# Altium PCB PCB1.PcbDoc
Units mm, origin at the board's own origin, x right, y up, seen from the top; angles counter-clockwise.
Board outline 50.04 x 50.04 mm, 2 copper layers (Top Layer, Bottom Layer); 10 components, 5 nets, 34 pads, 207 vias.
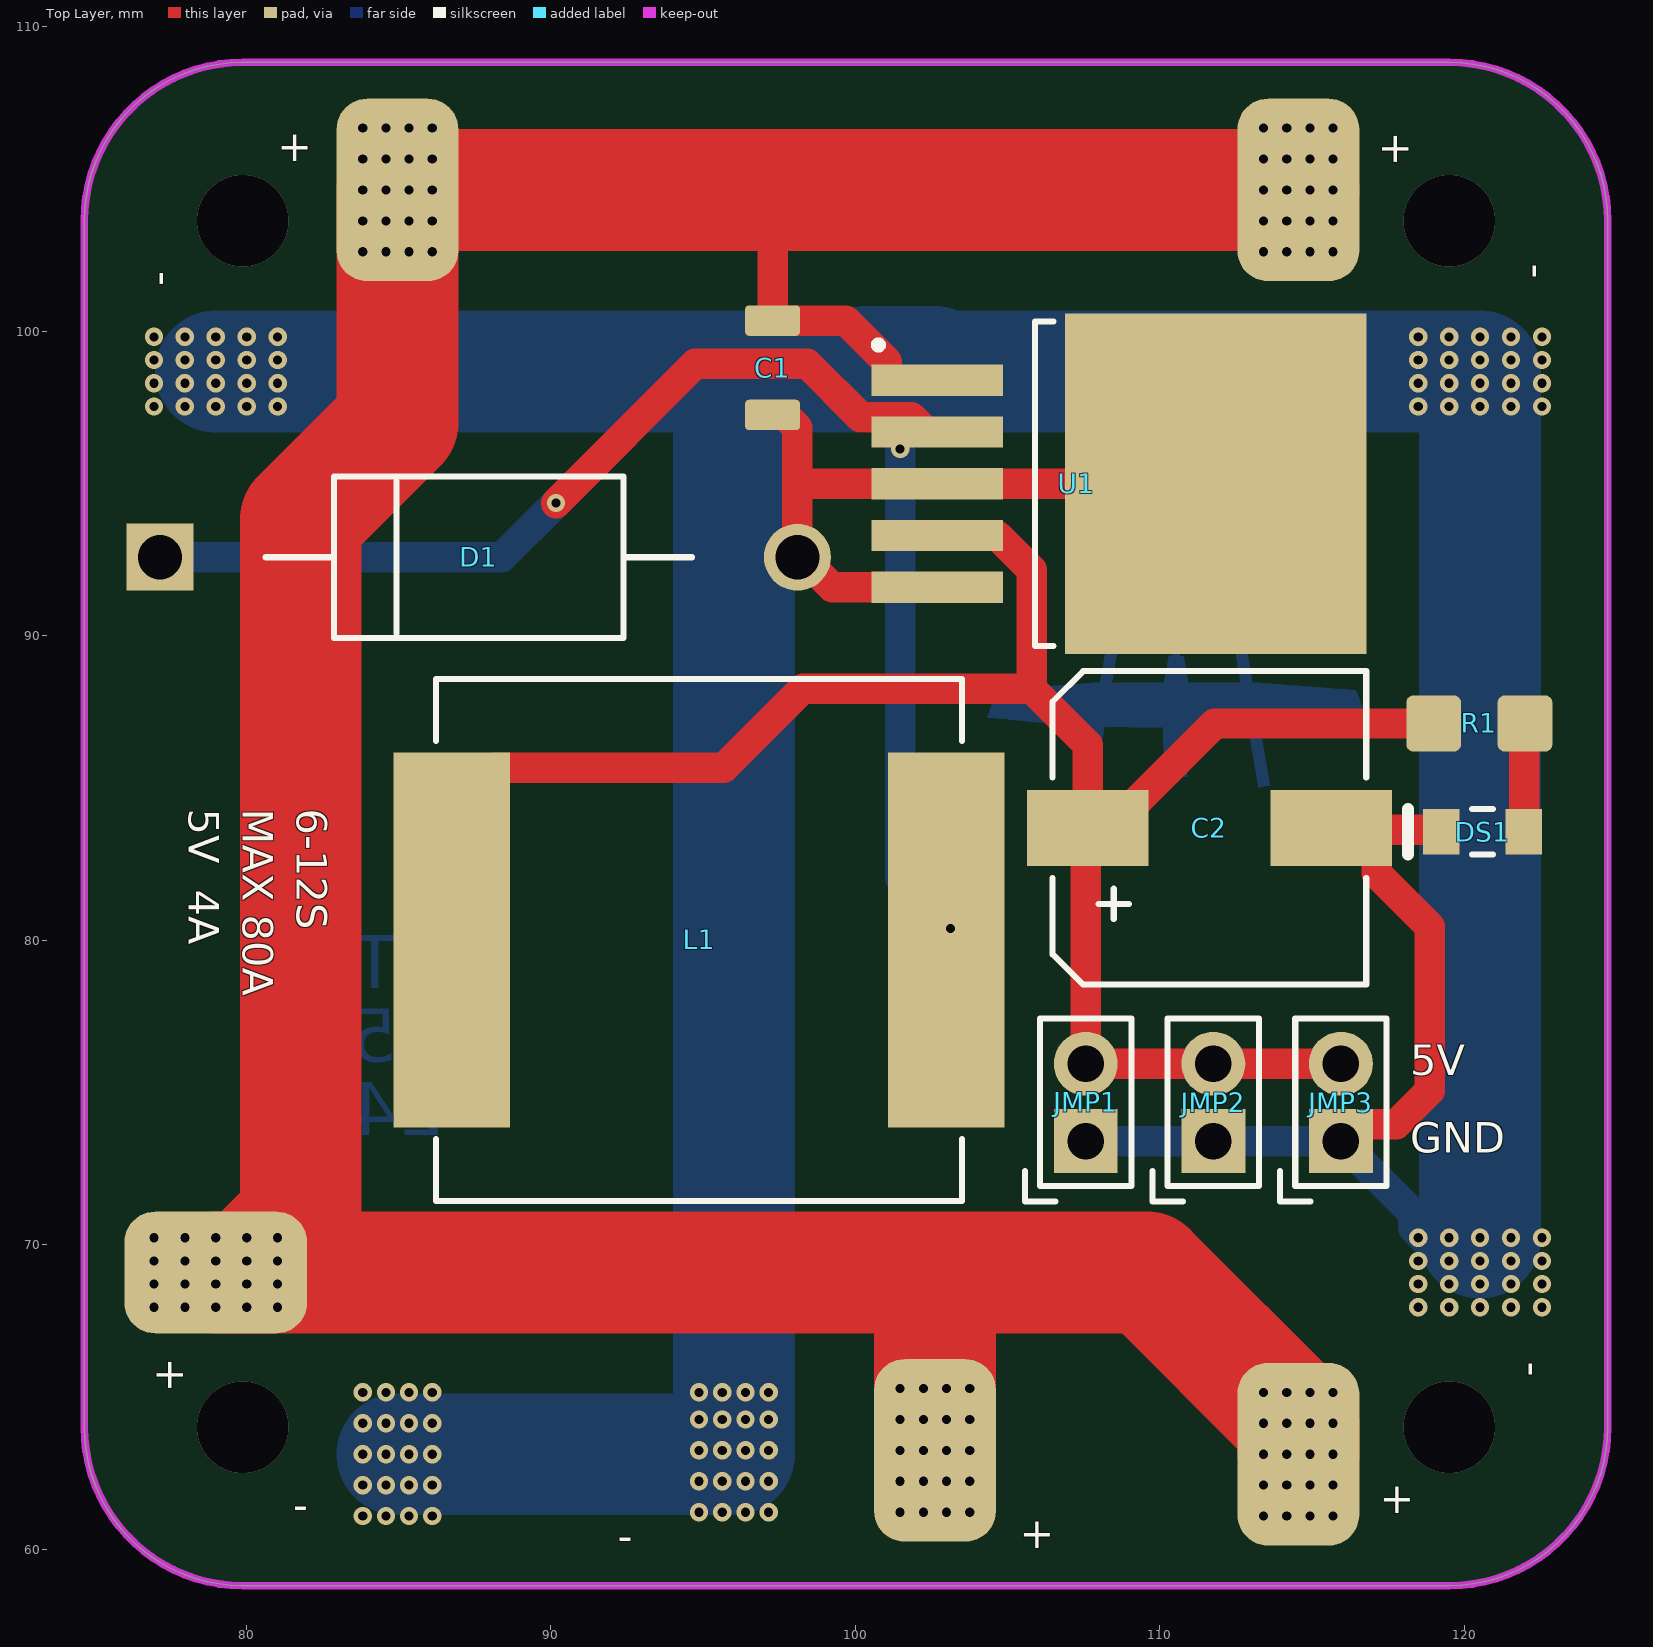
[diagram p0: Top Layer view]
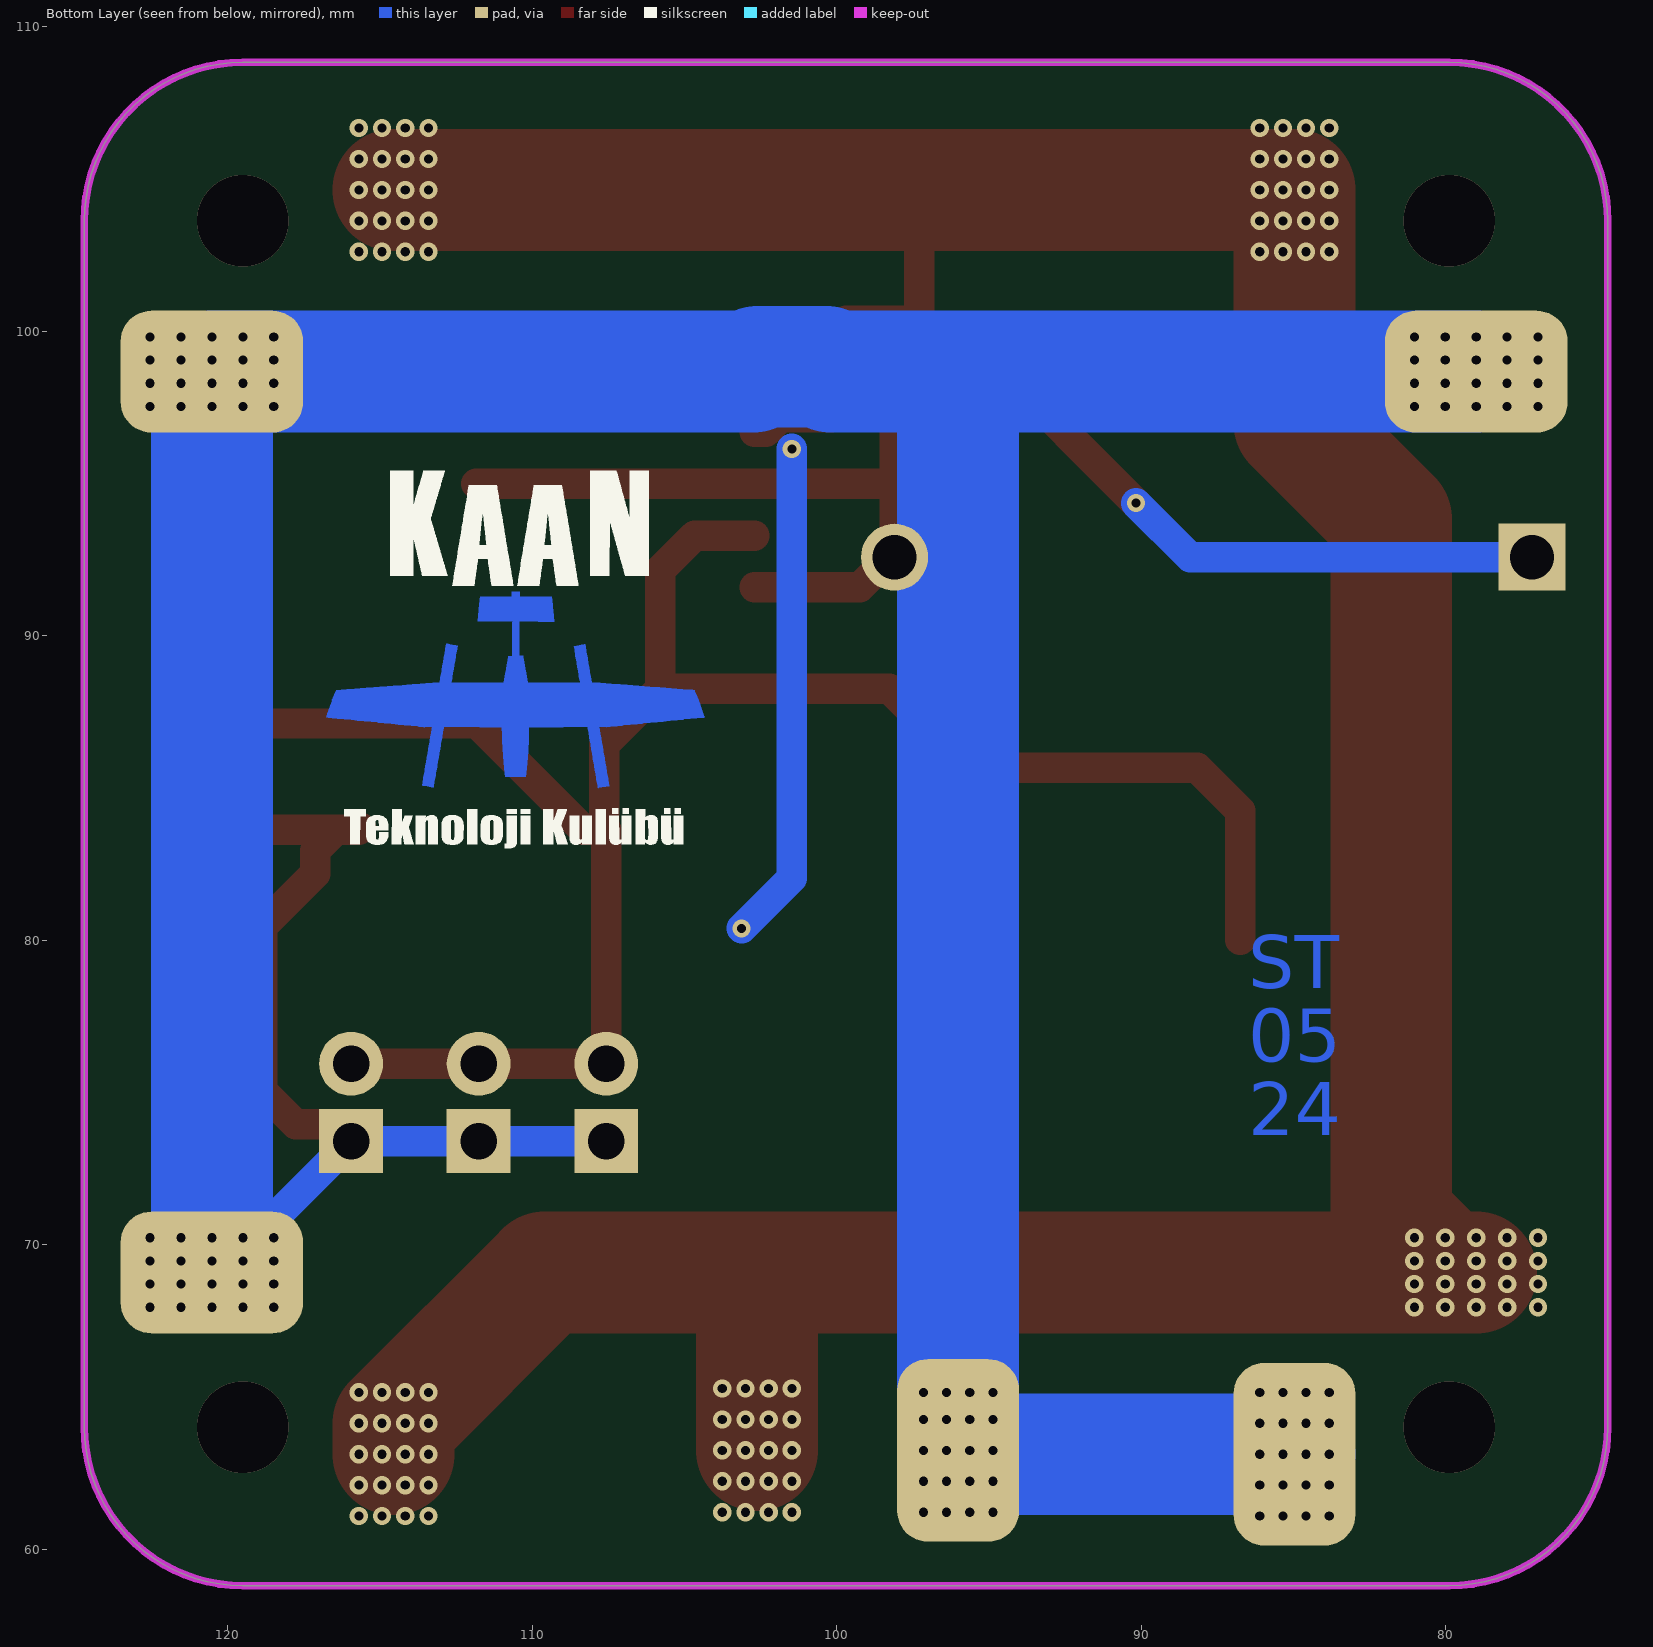
[diagram p1: Bottom Layer view, seen from below]
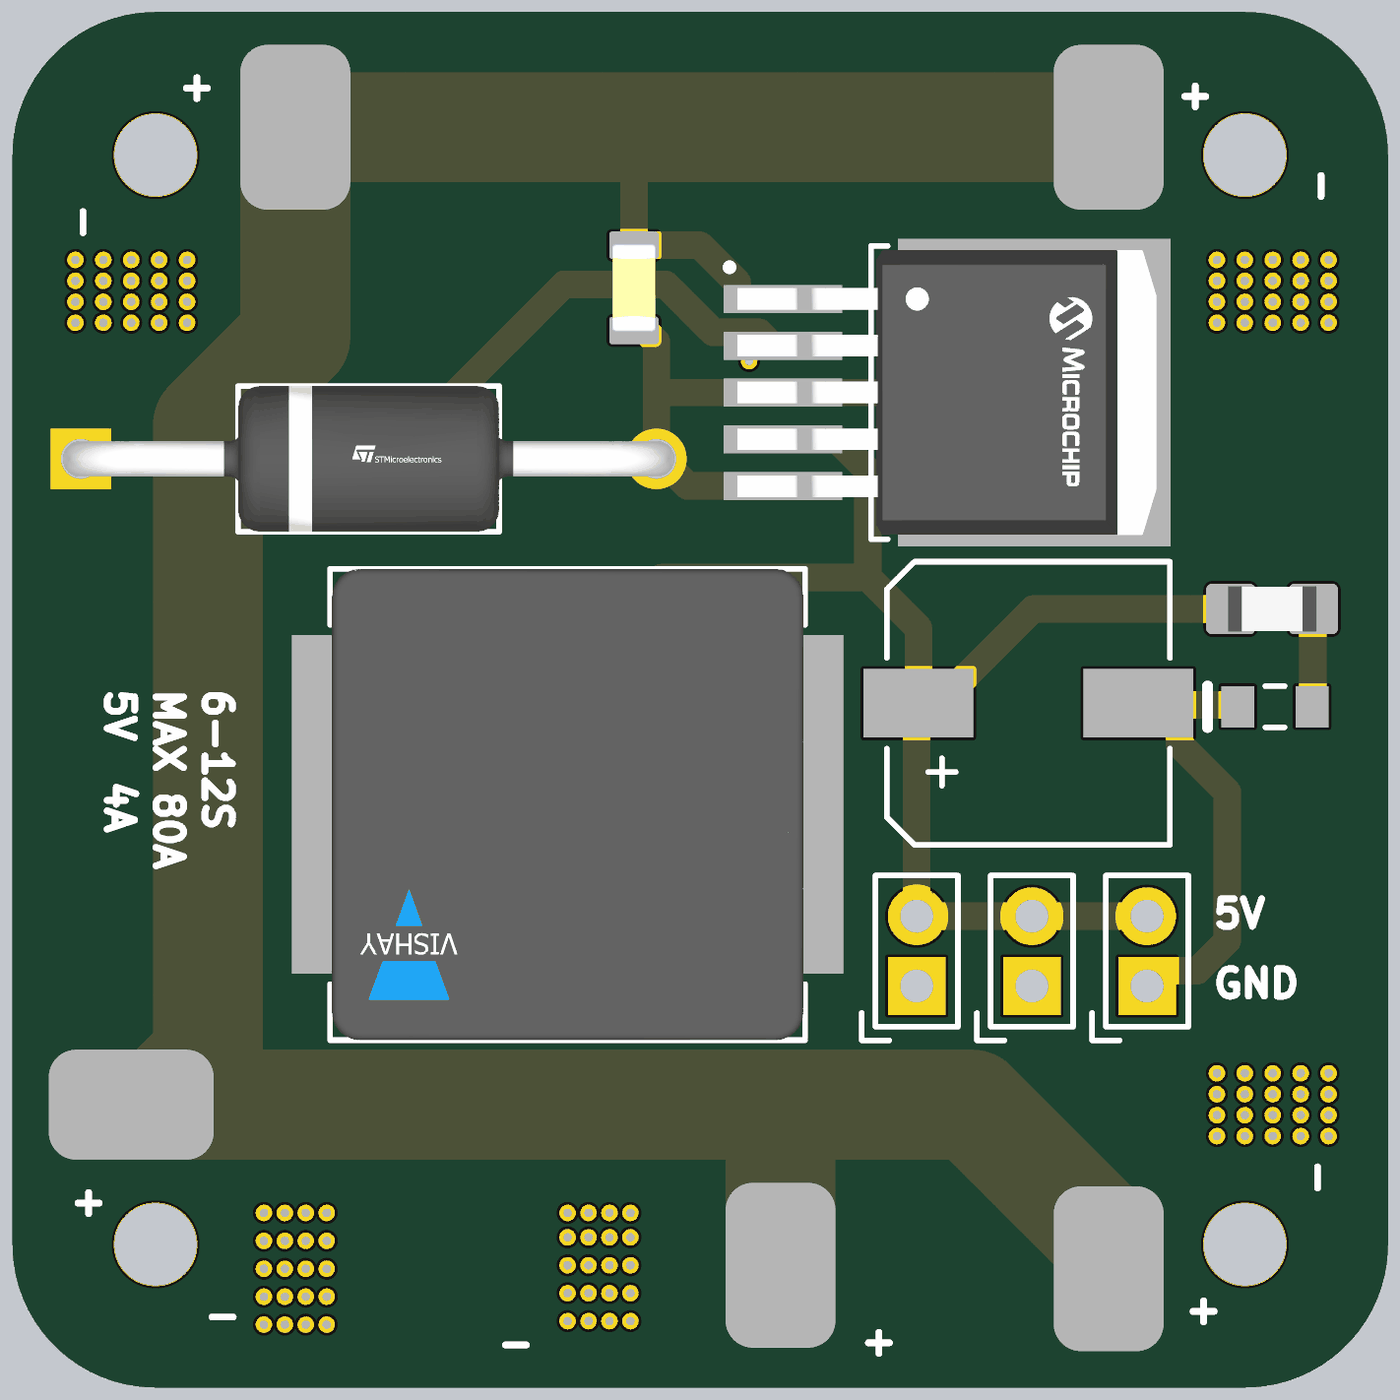
[diagram p2: 3D render of the assembled board from above, using the file's embedded part models]

## Layer stack, top to bottom
Top Solder: solder mask 0.0102, Solder Resist, Dk 3.5
Top Layer: signal copper 0.0356
Dielectric 1: dielectric 0.32, FR-4, Dk 4.8
Bottom Layer: signal copper 0.0356
Bottom Solder: solder mask 0.0102, Solder Resist, Dk 3.5

## Board outline
79.879,58.801 cw(c79.879,64.004) 74.676,64.004 74.676,103.636 cw(c79.879,103.636) 79.879,108.839 119.511,108.839 cw(c119.511,103.636) 124.714,103.636 124.714,64.004 cw(c119.511,64.004) 119.511,58.801

## Design rules (kind name [scope] priority, off if disabled: settings)
Clearance [All] p1: gap=0.2 ignorepadtopadclearanceinfootprint=FALSE except(0: Arc-Hole Track-Hole SMDPad-Hole THPad-Hole Via-Hole Fill-Hole Poly-Hole Region-Hole Text-Hole)
PolygonConnect [All] p1: connectstyle=Relief reliefconductorwidth=0.254 reliefentries=4 polygonreliefangle="90 Angle" airgapwidth=0.254
RoutingVias [All] p1: holewidth=0.3 width=0.6 viastyle="Through Hole" minholewidth=0.25 minwidth=0.5 maxholewidth=2.5 maxwidth=5
SolderMaskExpansion [All] p1: expansion=0.102 istentingtop=FALSE
Width [All] p1: maxlimit=10 minlimit=0.1 preferedwidth=0.3 minimp=50.000000 maximp=50.000000 favimp=50.000000
30 further rules are at their usual default settings.

## Components (designator, comment, footprint, x,y, rotation, side; value= is the part's Value field where it differs from the comment)
C1 "100u" CAP_1206 97.282,98.806 r90 top
C2 "1000u" NIC-UCL-10x13.5-2_V 111.633,83.693 r90 top
D1 "1N5822" FP-DO-201AD-MFG 87.63,92.583 r0 top
DS1 "red" LUMX-SML-LX1206YC-TR_V 120.603,83.566 r180 top
JMP1 "Jumper" JMP2_TH 107.569,74.676 r90 top
JMP2 "Jumper" JMP2_TH 111.76,74.676 r90 top
JMP3 "Jumper" JMP2_TH 115.951,74.676 r90 top
L1 "100uH" FP-IHLP-6767GZ-FP_3_825x1-MFG 94.869,80.01 r180 top
R1 "820" RES_1206 120.499,87.122 r0 top
U1 "LM2576-5.0WU" FP-TO263-5LD-PL-1-MFG 110.49,94.996 r270 top

## Footprints (in the part's own frame and the unit in brackets; to place one, negate y for a bottom-side part, rotate by r counter-clockwise, add the part's x,y. Pads: shape width x height; smd on the part's side, far side on the other; paste and mask are expansions set on the pad)
CAP_1206 [mm]
  rrect25% 1x1.8 smd: 1(-1.55,0) 2(1.55,0)
  body extent -1.6,-0.8 1.6,0.8, height 0.94
FP-DO-201AD-MFG [mm]
  rect 2.2x2.2 hole 1.45 paste-2539.97 mask+0: 1(-10.47,0)
  round 2.2 hole 1.45 paste-2539.97 mask+0: 2(10.47,0)
  silkscreen extent -7,-2.65 7,2.65, body extent -11.67,-2.75 11.67,2.75, height 0.25
FP-IHLP-6767GZ-FP_3_825x1-MFG [mm]
  rect 3.825x12.32 smd paste+0 mask+0: 1(-8.117,0) 2(8.117,0)
  silkscreen extent -8.64,-8.57 8.64,8.57, body extent -10.13,-8.67 10.13,8.67, height 0.25
FP-TO263-5LD-PL-1-MFG [mm]
  rect 1.02x4.32 smd paste+0 mask+0: 1(-3.4,-7.79) 2(-1.7,-7.79) 3(0,-7.79) 4(1.7,-7.79) 5(3.4,-7.79)
  rect 11.18x9.91 smd paste+0 mask+0: 6(0,1.355)
  silkscreen extent -5.33,-9.85 5.33,-3.98, body extent -5.69,-10.05 5.69,6.41, height 0.25
JMP2_TH [mm]
  rect 2.1x2.1 hole 1.2: 1(-1.27,0)
  round 2.1 hole 1.2: 2(1.27,0)
  silkscreen extent -3.25,-1.5 2.75,2
LUMX-SML-LX1206YC-TR_V [mm] "SMD, 2-Leads, Body 3.2x1.5mm"
  rect 1.2x1.5 smd: 1(-1.35,0) 2(1.35,0)
  silkscreen extent -0.35,-0.75 2.45,0.75, body extent -1.6,-0.75 1.6,0.75, height 1.25
NIC-UCL-10x13.5-2_V [mm] "SMD, 2-Leads,Body 10.3x10.3mm, Height 14.3mm"
  rect 2.5x4 smd: 1(0,4) 2(0,-4)
  silkscreen extent -5.15,-5.15 5.15,5.15, body extent -5.15,-5.45 5.15,5.45, height 14.3
RES_1206 [mm]
  rrect25% 1.8x1.84 smd: 1(-1.5,0) 2(1.5,0)
  body extent -1.6,-0.83 1.6,0.83, height 0.57

## Part data
C1: library part CAP_1206, "Capacitor SMD 1206"
C2: library part CMP-0926-00001-1, "Aluminum Electrolytic Capacitor, Low Impedance, 1000 uF +/- 20%, 16 V, -55 to 105 degC, 2-Pin 10.3 x 10.3 x 13.5 mm SMD, RoHS, Reel", Capacitance Tolerance="+/- 20%", Category Temperature Range="-55 to 105 degC", Leakage Current="160 uA", Manufacturer=Nichicon, PartNumber=UCL1C102MNL1GS, Rated Capacitance="1000 uF", Rated Ripple Current (at 100 kHz)="1190 mA", Rated Voltage="16 V", ComponentLink1Description="Manufacturer URL", ComponentLink1URL=www.nichicon.com, ComponentLink2Description=Datasheet, ComponentLink2URL=http://nichicon-us.com/english/products/pdfs/e-cl.pdf, DatasheetVersion=Sep-13, Impedance="0.06 ohm", Mounting Technology="Surface Mount", PackageDescription="2-Pin SMD, Body 10.3 x 10.3 mm, Height 14.3 mm", PackageReference=UCL-10x13.5-2, Packing=Reel, Polarity Type=Polar, RoHS=TRUE
D1: library part CMP-12187-000025-1, "DIODE SCHOTTKY 40V 3A DO201AD", Forward Current=3A, Manufacturer=STMicroelectronics, Max Junction Temp=+150°C, Max Repetitive Reverse Voltage=40V, Max Surge Forward Current=80A, Package=DO-201AD, Peak Reverse Current=2mA, Temperature="to +150°C", Automotive=No, Category=Diode, ComponentLink2Description=Datasheet, ComponentLink2URL=https://www.st.com/resource/en/datasheet/1n5822.pdf, Device Class L1="Discrete Semiconductors", Device Class L2=Diodes, Device Class L3="Schottky Diodes", Digikey Description="DIODE SCHOTTKY 40V 3A DO201AD", Height=5.3mm, Lead Free=Yes, Manufacturer Part Number=1N5822, Mouser Description="Schottky Diodes & Rectifiers Vr/40V Io/3A BULK", Octopart=https://octopart.com/1n5822-stmicroelectronics-323225, RoHS=TRUE, Temperature Range High=+150°C
DS1: library part CMP-2000-07124-1, "Yellow LED, Water Clear Len, 585 nm, 2.1 V, -40 to 85 degC, 2-Pin SMD, RoHS, Tape and Reel", Color=Yellow, Current - Test=20mA, Lens Color=Colorless, Manufacturer=Lumex, Millicandela Rating=6mcd, Package / Case=1206(3216Metric), Package Description="2-Pin Surface Mount Device, Body 3.2 x 1.5 mm", Package Reference=SML-LX1206YC-TR, Standard Package=3,000, Supplier Device Package=1206, Voltage - Forward (Vf) (Typ)=2.1V, Catalog Drawings=SML-LX1206SeriesTopSML-LX1206SeriesSideSML-LX1206SeriesBottomSML-LX1206SeriesFootprint, Category=Optoelectronics, Datasheet URL=http://www.lumex.com/content/files/ProductAttachment/SML-LX1206YC-TR.pdf, Datasheet Version="Rev. K, 08/2012", Family=LEDIndication-Discrete, Features=-, Height (Max)=1.10mm, Lens Style/Size=RectanglewithFlatTop, Lens Transparency=Clear, Manufacturer URL=http://www.lumexinstruments.com/, Mounting Technology=SurfaceMount, Mounting Type=SurfaceMount, Online Catalog=SML-LX1206RectanglewithFlatTop1206PackageLEDs, Other Names=67-1358-2LU60357TRSMLLX1206YCTR, Packaging=Tape&Reel(TR), Product Training Modules=LEDsBenefitsofCustomLEDandLCDTechnology, RoHS Information=RoHSCertofCompliance, Series=-, Size / Dimension=3.20mmLx1.60mmW, Viewing Angle=160°, Wavelength - Dominant=-, Wavelength - Peak=585nm
JMP1 JMP2 JMP3: library part JMP2_TH, "Jumper 2 Pins Through-Hole DO NOT PLACE"
L1: library part CMP-02424-000256-1, "Commercial Inductors, Low DCR Series 100uH 5A 110mΩ 20%", Case/Package=6767, Current Rating=5A, DC Resistance (DCR)=110mR, Inductance Tolerance=20%, Max DC Current=4A, Max Operating Temperature=125°C, Min Operating Temperature=-55°C, Package Quantity=200, Self Resonant Frequency=2.1MHz, Test Frequency=100kHz, Core Material=Metal, Depth=17.15mm, Height=7mm, Height - Seated (Max)=0.276inch, Inductance=100uH, Lead Free="Lead Free", Length=17.15mm, Military Standard=Not, Mount="Surface Mount", Number of Pins=2, Packaging="Tape and Reel", Radiation Hardening=No, RMS Current (Irms)=5A, Saturation Current=4A, Shielding=Shielded, Termination=SMD/SMT, Tolerance=20%, Width=0.675inch
R1: library part RES_1206, "Resistor SMD 1206"
U1: library part CMP-06325-000018-1, "IC REG BUCK 5V 3A TO263-5", Case/Package=TO-263-6, Max Input Voltage=40V, Max Operating Temperature=125°C, Min Input Voltage=4V, Min Operating Temperature=-40°C, Min Output Voltage=5V, Output Current=3A, Switching Frequency=52kHz, Lead Free="Lead Free", Mount="Surface Mount", Nominal Output Voltage=5V, Number of Outputs=1, Number of Pins=5, Output Configuration=Positive, Output Type=Fixed, Output Voltage=5V, Packaging=Bulk, REACH SVHC="No SVHC", Synchronous Rectifier=No

## Free pads (board coordinates)
  rrect50% 6x4 smd paste+0 mask+0: 5(78.994,69.088)
  rrect50% 6x4 smd far side paste+0 mask+0: 5(78.994,98.679) 5(120.523,69.088) 5(120.523,98.679)
  rrect50% 4x6 smd far side paste+0 mask+0: 5(84.963,63.119) 5(96.012,63.246)
  rrect50% 4x6 smd paste+0 mask+0: 5(84.963,104.648) 5(102.616,63.246) 5(114.554,63.119) 5(114.554,104.648)

## Via types
v1: diameter 0.6/0.6 (per signal layer), hole 0.3, Top Layer to Bottom Layer, 203 vias
v2: diameter 3, hole 3, Top Layer to Bottom Layer, 4 vias

## Nets (pads, with @x,y where several pads share a name; then routed paths per layer and width w, separated by ;. In a path a pad name is that pad's centre, name@x,y a point inside that pad or via, vN(x,y) a via of type N, cw(c..) or ccw(c..) an arc to the next point about the centre after c; other vN are vias at no path point)
+5: C2.1 JMP1.2 JMP2.2 JMP3.2 L1.2 R1.1 U1.4 | length 66.7
  Top Layer w1: L1.2 86.752,84.257 88.164,85.67 95.68,85.67 98.275,88.265 105.791,88.265 ; U1.4 102.71,93.286 104.67,93.286 105.791,92.165 105.791,88.265 ; C2.1 107.633,86.423 105.791,88.265 ; JMP3.2 JMP2.2 JMP1.2 107.569,83.629 108.319,83.629 111.812,87.122 R1.1
GND: C1.1 C2.2 D1.2 DS1.2 JMP1.1 JMP2.1 JMP3.1 pad.5@78.994,98.679 pad.5@84.963,63.119 pad.5@96.012,63.246 pad.5@120.523,69.088 pad.5@120.523,98.679 U1.3 U1.5 U1.6 | length 172.5
  Top Layer w1: C1.1 97.682,97.256 98.1,96.838 98.1,94.996 ; U1.5 99.24,91.596 98.253,92.583 D1.2 98.1,94.996 ; U1.6 U1.3 98.1,94.996 ; C2.2 115.696,83.629 C2.2@116.447,83.629 ; JMP3.1 116.501,73.956 117.771,73.956 118.872,75.057 118.872,80.454 117.133,82.193 117.133,82.943 C2.2@116.447,83.629 ; DS1.2 119.189,83.629 C2.2@116.447,83.629
  Bottom Layer w1: JMP1.1 JMP2.1 JMP3.1 118.332,71.025 118.332,70.55 119.794,69.088 pad.5@120.523,69.088
  Bottom Layer w4: pad.5@78.994,98.679 96.012,98.679 ; pad.5@84.963,63.119 pad.5@96.012,63.119 ; pad.5@96.012,63.246 96.012,98.679 ; v1(120.523,70.231) v1(120.523,97.536) v1(120.523,98.298) 120.523,98.679 102.751,98.679 102.591,98.839 100.355,98.839 100.195,98.679 96.012,98.679
  other v1: 83.82,61.087 84.582,61.087 85.344,61.087 86.106,61.087 94.869,61.214 95.631,61.214 96.393,61.214 97.155,61.214 83.82,62.103 84.582,62.103 85.344,62.103 86.106,62.103 94.869,62.23 95.631,62.23 96.393,62.23 97.155,62.23 83.82,63.119 84.582,63.119 85.344,63.119 86.106,63.119 94.869,63.246 95.631,63.246 96.393,63.246 97.155,63.246 83.82,64.135 84.582,64.135 85.344,64.135 86.106,64.135 94.869,64.262 95.631,64.262 96.393,64.262 97.155,64.262 83.82,65.151 84.582,65.151 85.344,65.151 86.106,65.151 94.869,65.151 95.631,65.151 96.393,65.151 97.155,65.151 118.491,67.945 119.507,67.945 120.523,67.945 121.539,67.945 122.555,67.945 118.491,68.707 119.507,68.707 120.523,68.707 121.539,68.707 122.555,68.707 118.491,69.469 119.507,69.469 120.523,69.469 121.539,69.469 122.555,69.469 118.491,70.231 119.507,70.231 121.539,70.231 122.555,70.231 76.962,97.536 77.978,97.536 78.994,97.536 80.01,97.536 81.026,97.536 118.491,97.536 119.507,97.536 121.539,97.536 122.555,97.536 76.962,98.298 77.978,98.298 78.994,98.298 80.01,98.298 81.026,98.298 118.491,98.298 119.507,98.298 121.539,98.298 122.555,98.298 76.962,99.06 77.978,99.06 78.994,99.06 80.01,99.06 81.026,99.06 118.491,99.06 119.507,99.06 120.523,99.06 121.539,99.06 122.555,99.06 76.962,99.822 77.978,99.822 78.994,99.822 80.01,99.822 81.026,99.822 118.491,99.822 119.507,99.822 120.523,99.822 121.539,99.822 122.555,99.822
NetD1_1: D1.1 L1.1 U1.2 | length 45.5
  Top Layer w1: v1(90.17,94.361) 94.742,98.933 98.425,98.933 100.172,97.186 101.84,97.186 102.33,96.696 U1.2
  Bottom Layer w1: D1.1 88.392,92.583 v1(90.17,94.361) ; v1(101.473,96.139) 101.473,82.042 v1(103.124,80.391)
NetDS1_1: DS1.1 R1.2 | length 3.6
  Top Layer w1: DS1.1 121.976,83.589 121.976,87.099 R1.2
VIN: C1.2 pad.5@78.994,69.088 pad.5@84.963,104.648 pad.5@102.616,63.246 pad.5@114.554,63.119 pad.5@114.554,104.648 U1.1 | length 121.6
  Top Layer w1: 97.282,104.648 C1.2 99.682,100.356 101.04,98.998 101.04,98.406 101.05,98.396 U1.1
  Top Layer w4: pad.5@78.994,69.088 81.788,69.088 102.743,69.088 ; pad.5@80.7,69.794 81.788,70.882 81.788,93.825 84.963,97 84.963,104.648 97.282,104.648 pad.5@114.554,104.648 ; pad.5@102.616,63.246 102.616,65.278 102.616,68.961 102.743,69.088 ; pad.5@114.554,63.119 114.554,64.119 109.585,69.088 102.743,69.088
  other v1: 113.411,61.087 114.173,61.087 114.935,61.087 115.697,61.087 101.473,61.214 102.235,61.214 102.997,61.214 103.759,61.214 113.411,62.103 114.173,62.103 114.935,62.103 115.697,62.103 101.473,62.23 102.235,62.23 102.997,62.23 103.759,62.23 113.411,63.119 114.173,63.119 114.935,63.119 115.697,63.119 101.473,63.246 102.235,63.246 102.997,63.246 103.759,63.246 113.411,64.135 114.173,64.135 114.935,64.135 115.697,64.135 101.473,64.262 102.235,64.262 102.997,64.262 103.759,64.262 113.411,65.151 114.173,65.151 114.935,65.151 115.697,65.151 101.473,65.278 102.235,65.278 102.997,65.278 103.759,65.278 76.962,67.945 77.978,67.945 78.994,67.945 80.01,67.945 81.026,67.945 76.962,68.707 77.978,68.707 78.994,68.707 80.01,68.707 81.026,68.707 76.962,69.469 77.978,69.469 78.994,69.469 80.01,69.469 81.026,69.469 76.962,70.231 77.978,70.231 78.994,70.231 80.01,70.231 81.026,70.231 83.82,102.616 84.582,102.616 85.344,102.616 86.106,102.616 113.411,102.616 114.173,102.616 114.935,102.616 115.697,102.616 83.82,103.632 84.582,103.632 85.344,103.632 86.106,103.632 113.411,103.632 114.173,103.632 114.935,103.632 115.697,103.632 83.82,104.648 84.582,104.648 85.344,104.648 86.106,104.648 113.411,104.648 114.173,104.648 114.935,104.648 115.697,104.648 83.82,105.664 84.582,105.664 85.344,105.664 86.106,105.664 113.411,105.664 114.173,105.664 114.935,105.664 115.697,105.664 83.82,106.68 84.582,106.68 85.344,106.68 86.106,106.68 113.411,106.68 114.173,106.68 114.935,106.68 115.697,106.68
copper on no net:
  other v2: 79.879,64.004 119.511,64.004 79.879,103.636 119.511,103.636

## Keep-outs
Keep-Out Layer:
  the board outline again, w0.254

## Other copper
Bottom Layer:
  region: 655 vertices and 0 holes, not listed, extent 104.336,85.002 116.769,91.448
  text "ST" at 86.487,77.851 h3
  text "05" at 86.49,75.438 h3
  text "24" at 86.487,73.025 h3

## Silkscreen, mask and mechanical layers (free items; w line width, h text height)
Top Overlay:
  text "+" at 117.312,106.557 h1 r270
  text "+" at 82.169,106.466 h1 r180
  text "-" at 76.843,101.981 h1 r270
  text "-" at 122.674,101.727 h1 r90
  text "5V  4A" at 78.105,84.328 h1 r270
  text "MAX 80A" at 79.883,84.328 h1 r270
  text "6-12S" at 81.661,84.328 h1 r270
  text "5V" at 118.237,75.565 h1
  text "GND" at 118.237,73.025 h1
  text "+" at 77.049,66.294 h1 r270
  text "-" at 122.547,65.659 h1 r90
  text "+" at 117.221,61.174 h1
  text "-" at 81.534,60.968 h1
  text "+" at 105.41,60.031 h1
  text "-" at 92.202,59.952 h1
Bottom Overlay:
  drawing of 25 lines, arcs and shapes, not listed
Bottom Solder:
  region: 655 vertices and 0 holes, not listed, extent 104.336,85.002 116.769,91.448
  text "ST" at 86.487,77.851 h3
  text "05" at 86.49,75.438 h3
  text "24" at 86.487,73.025 h3